# EAGLE board OctoWatchSchemePackage1NoWire (EAGLE 9.4.2)
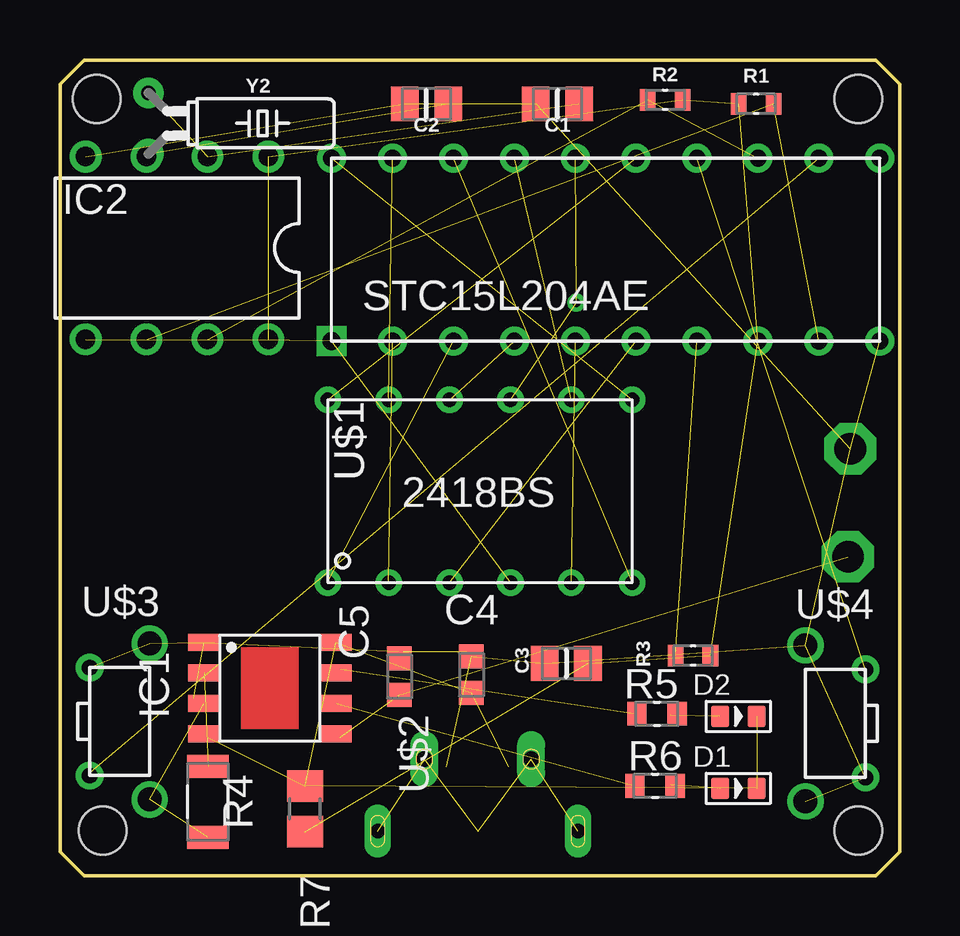
[diagram p0: board, top side]
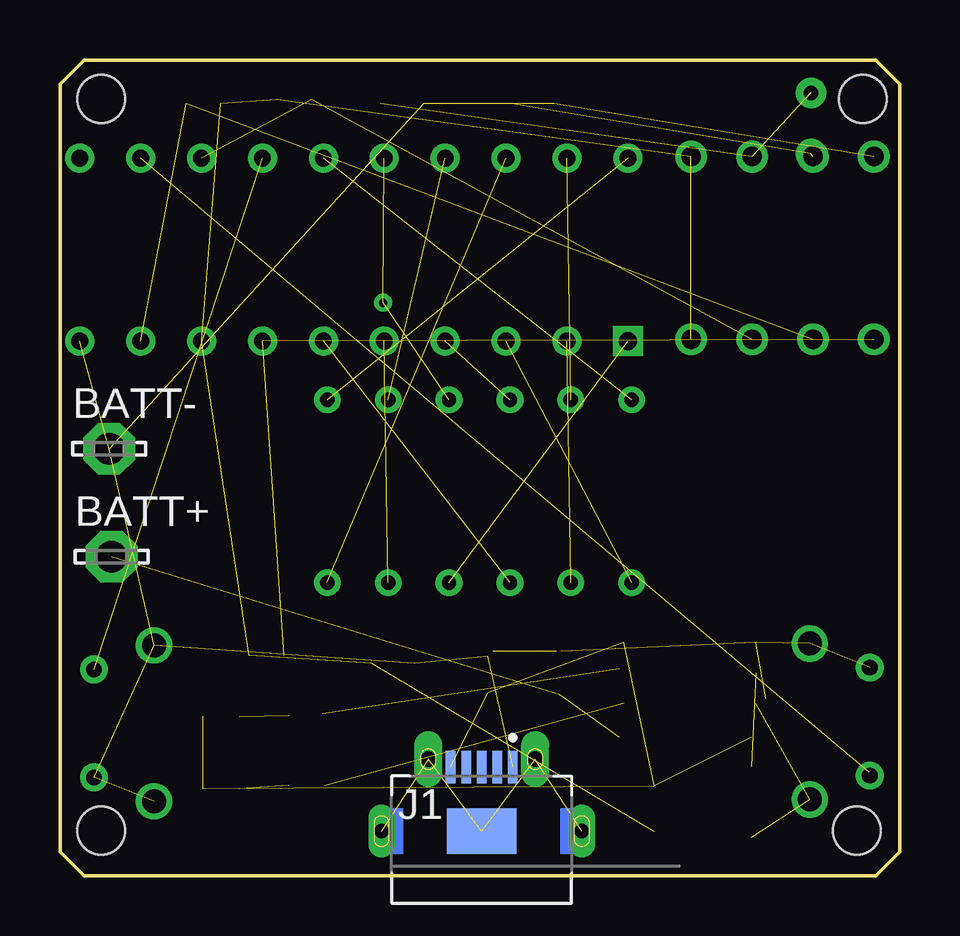
[diagram p1: board, bottom side, seen from below]

Size 35 x 34 mm. Coordinates in mm from the lower left corner, seen from the top.
Outline: 0,33 0,1 1,0 34,0 35,1 35,33 34,34 1,34 0,33
Copper layers (1*16): Top 0.035mm / dielectric 1.5mm / Bottom 0.035mm
Design rules "default *": minimum track width 10mil, minimum drill 0.35mm, track to track 6mil, track to pad 6mil, pad to pad 6mil, via to via 6mil, smd to smd 6mil, copper to edge 40mil, drill to drill 6mil, minimum pad ring 10mil, minimum via ring 8mil, stop-mask expansion 4mil, vias tented up to drill 0mil, thermal gap 10mil
Holes 2 mm at 33.28,32.38 1.53,32.38 1.78,1.88 33.28,1.88

## Footprints (pad centres in the part's own frame; a part is rotated, then mirrored left to right if it is on the bottom)
LSP13 = drill 1.321 pad 2.159 octagon: MP 0,0
CAPC2012X140N = smd 1.15 x 1.45: 1 -0.9,0; 2 0.9,0
CAPC1608X100N = smd 1 x 1.02: 1 -0.759,0; 2 0.759,0
LED-0603 = smd 0.762 x 0.889: + -0.762,0; - 0.762,0
SOP-8 = smd 1.3 x 0.7: 1 -2.75,1.905; 2 -2.75,0.635; 3 -2.75,-0.635; 4 -2.75,-1.905; 5 2.75,-1.905; 6 2.75,-0.635; 7 2.75,0.635; 8 2.75,1.905
DIL08 = drill 0.813: -RST 3.81,3.81; GND 3.81,-3.81; I/O 1.27,3.81; SCLK -1.27,3.81; VCC1 -3.81,3.81; VCC2 -3.81,-3.81; X1 -1.27,-3.81; X2 1.27,-3.81
0475900001 = smd 0.4 x 1.35: 1 1.3,2.675; 2 0.65,2.675; 3 0,2.675; 4 -0.65,2.675; 5 -1.3,2.675 | drill 0.65 pad 0.85 long: SH1 -2.225,3; SH2 2.225,3 | drill 0.6 pad 0.8 long: SH3 -4.175,0; SH4 4.175,0 | smd 2.9 x 1.9: SH5 0,0
RES_ERA3AEB103V = smd 0.65 x 0.9: 1 -0.725,0; 2 0.725,0
RESC3116X65N = smd 0.97 x 1.73: 1 -1.48,0; 2 1.48,0
RESC1608X55N = smd 0.8 x 0.98: 1 -0.837,0; 2 0.837,0
R0805 = smd 1.3 x 1.5: 1 -0.95,0; 2 0.95,0
LED_SEGMENT = drill 0.6: P$1 -12.7,7.62; P$2 -12.7,5.08; P$3 -12.7,2.54; P$4 -12.7,0; P$5 -12.7,-2.54; P$6 -12.7,-5.08; P$7 -5.08,-5.08; P$8 -5.08,-2.54; P$9 -5.08,0; P$10 -5.08,2.54; P$11 -5.08,5.08; P$12 -5.08,7.62
STC15F204AE2 = drill 0.75 square: P$1 -12.7,10.16 | drill 0.7: P$2 -12.7,7.62; P$3 -12.7,5.08; P$4 -12.7,2.54; P$5 -12.7,0; P$6 -12.7,-2.54; P$7 -12.7,-5.08; P$8 -12.7,-7.62; P$9 -12.7,-10.16; P$10 -12.7,-12.7; P$11 -5.08,-12.7; P$12 -5.08,-10.16; P$13 -5.08,-7.62; P$14 -5.08,-5.08; P$15 -5.08,-2.54; P$16 -5.08,0; P$17 -5.08,2.54; P$18 -5.08,5.08; P$19 -5.08,7.62; P$20 -5.08,10.16
BUTTON = drill 0.65: P$1 -9,4.5; P$2 -9,0 | drill 1: P$3 -11.5,-1; P$4 -11.5,5.5
CRYSTAL-PTH-2X6-CYL = drill 0.6 pad 1.27: 1 -1.27,0; 2 1.27,0

## Placement (x,y rotation side)
BATT+  LSP13  [LSP13]  32.85,13.29 0 bottom
BATT-  LSP13  [LSP13]  32.95,17.79 0 bottom
C1  CL21C220JBANNNC  [CAPC2012X140N]  20.74,32.17 180 top
C2  CL21C220JBANNNC  [CAPC2012X140N]  15.28,32.17 180 top
C3  CL21B104KCFNNNE  [CAPC2012X140N]  21.11,8.84 0 top
C4  10uf  [CAPC1608X100N]  17.15,8.37 90 top
C5  10uf  [CAPC1608X100N]  14.15,8.29 90 top
D1  SMD-LED-CLEAR-BLUE(0603)  [LED-0603]  28.28,3.63 0 top
D2  LED-SMD-RED-DIFFUSED(0603)  [LED-0603]  28.28,6.63 0 top
IC1  TP4056  [SOP-8]  8.75,7.81 0 top
IC2  DS1302  [DIL08]  4.88,26.16 180 top
J1  0475900001  [0475900001]  17.42,1.85 0 bottom
R1  ERA3AEB103V  [RES_ERA3AEB103V]  29.02,32.17 180 top
R2  ERA3AEB103V  [RES_ERA3AEB103V]  25.23,32.34 0 top
R3  ERA3AEB103V  [RES_ERA3AEB103V]  26.39,9.17 180 top
R4  122  [RESC3116X65N]  6.17,3.07 90 top
R5  102  [RESC1608X55N]  24.89,6.74 0 top
R6  102  [RESC1608X55N]  24.81,3.74 0 top
R7  104  [R0805]  10.21,2.78 270 top
U$1  [LED_SEGMENT]  18.78,24.91 90 top
U$2  [STC15F204AE2]  21.48,34.98 90 top
U$3  BUTTON  [BUTTON]  -7.76,8.67 180 top
U$4  BUTTON  [BUTTON]  42.58,4.09 0 top
Y2  32.768kHz  [CRYSTAL-PTH-2X6-CYL]  3.69,31.36 270 top

## Library data of the parts
BATT+ BATT- = solpad
C1 C2 = CL21C220JBANNNC; AVAILABILITY: In Stock; DESCRIPTION: 22pF ±5% 50V Ceramic Capacitor C0G, NP0 0805 (2012 Metric); MF: Samsung Electro-Mechanics; MP: CL21C220JBANNNC; PACKAGE: 2012-2 Samsung; PRICE: None
C3 = CL21B104KCFNNNE; AVAILABILITY: In Stock; DESCRIPTION: 0.1µF ±10% 100V Ceramic Capacitor X7R 0805 (2012 Metric); MF: Samsung; MP: CL21B104KCFNNNE; PACKAGE: 0805 Samsung; PRICE: None
C4 C5 = GRT188R61E106ME13D; AVAILABILITY: In Stock; DESCRIPTION: SMD Capacitor X5R(EIA) with Capacitance: 10uF Tol. 20%. Rated Voltage: 25Vdc; MF: Murata; MP: GRT188R61E106ME13D; PACKAGE: 1608 Murata; PRICE: None
D1 = SMD-LED-CLEAR-BLUE_0603_; AVAILABILITY: Not in stock; DESCRIPTION: Blue LED Indication - Discrete 2.8V 0603 (1608 Metric); MF: Everlight; MP: 19-217/BHC-ZL1M2RY/3T; PACKAGE: 0603 Everlight; PRICE: None
D2 = LED-SMD-RED-DIFFUSED_0603_; AVAILABILITY: In Stock; DESCRIPTION: Red LED Indication - Discrete 1.95V 0603 (1608 Metric); MF: Everlight Electronics; MP: 19-217/R6C-AL1M2VY/3T; PACKAGE: 0603 Everlight Electronics; PRICE: None
IC1 = TP4056
IC2 = ds1302
J1 = USB connector; CREATED_BY: PCBLayout.com; DIGIKEY_PARTNO: WM17144TR-ND; MANUFACTURER: Molex; MPN: 0475900001
R1-R3 = ERA3AEB103V; AVAILABILITY: No availability data; DESCRIPTION: 10 kOhms ±0.1% 0.1W, 1/10W Chip Resistor 0603 (1608 Metric) Automotive AEC-Q200 Thin Film; MF: Panasonic; MP: ERA3AEB103V; PACKAGE: 1608-2 Panasonic; PRICE: None
R4 = AC1206FR-073K9L; AVAILABILITY: In Stock; DESCRIPTION: Res Thick Film 1206 3.9K Ohm 1% 0.25W(1/4W) ±100ppm/°C Pad SMD Automotive T/R; MF: Yageo; MP: AC1206FR-073K9L; PACKAGE: 3116 Yageo; PRICE: None
R5 R6 = ERJ-PB3B1001V; AVAILABILITY: In Stock; DESCRIPTION: 1 kOhms ±0.1% 0.2W, 1/5W Chip Resistor 0603 (1608 Metric) Automotive AEC-Q200, Pulse Withstanding Thick Film; MF: Panasonic Electronic; MP: ERJ-PB3B1001V; PACKAGE: 1608 Panasonic Electronic Components; PRICE: None
R7 = rcl; SPICEPREFIX: R
U$1-U$4 = OctoWatch
Y2 = SparkFun-Clocks; PROD_ID: XTAL-10112

## Nets
BATT+: C3.2 IC2.VCC1 IC2.VCC2 R1.2 R2.2 R3.1 R7.2 U$2.P$8
GND: BATT-.MP C1.2 C2.2 C3.1 C4.2 C5.2 IC1.1 IC1.3 IC2.GND J1.1 R4.1 U$2.P$10 U$3.P$2 U$3.P$3 U$3.P$4 U$4.P$2 U$4.P$3 U$4.P$4
N$1: U$1.P$1 U$2.P$3
N$2: U$1.P$2 U$2.P$2
N$3: U$1.P$4 U$2.P$1
N$4: U$1.P$3 U$2.P$6
N$5: U$1.P$5 U$2.P$5
N$6: U$1.P$6 U$2.P$18
N$7: U$1.P$7 U$2.P$20
N$8: U$1.P$8 U$2.P$17
N$9: U$1.P$9 U$2.P$16
N$10: IC2.SCLK R2.1 U$2.P$13
N$11: IC2.-RST R3.2 U$2.P$7
N$12: U$1.P$12 U$2.P$15
N$13: C1.1 IC2.X1 Y2.1
N$14: C4.1 D1.- D2.- IC1.4 IC1.8 J1.5 R7.1
N$15: C2.1 IC2.X2 Y2.2
N$16: U$1.P$10 U$2.P$4
N$17: IC2.I/O R1.1 U$2.P$9
N$18: BATT+.MP C5.1 IC1.5
N$19: U$2.P$14 U$4.P$1
N$20: U$2.P$12 U$3.P$1
N$21: U$1.P$11 U$2.P$19
N$26: IC1.6 R6.1
N$27: D1.+ R6.2
N$28: IC1.7 R5.1
N$29: D2.+ R5.2
N$31: IC1.2 R4.2
SHIELD: J1.SH1 J1.SH2 J1.SH3 J1.SH4 J1.SH5

## Tracks (layer width: path | path; a pad name or v marks a point on that pad's centre or on a via)
BATT+  (7 unrouted)
GND  (17 unrouted)
  Top 0.254: 14.11,9.35 C5.2 14.31,9.35 | 16.95,9.35 C4.2 | 5.57,7.39 IC1.3
N$1  (1 unrouted)
N$2  (1 unrouted)
N$3  (1 unrouted)
N$4  (1 unrouted)
N$5  (1 unrouted)
N$6  (1 unrouted)
N$7  (1 unrouted)
N$8  (1 unrouted)
N$9  (via drill 0.35)  (2 unrouted)
  other vias: 21.53,23.88
N$10  (2 unrouted)
N$11  (2 unrouted)
N$12  (1 unrouted)
N$13  (2 unrouted)
N$14  (6 unrouted)
  Top 0.254: 6.18,5.77 IC1.4
N$15  (2 unrouted)
N$16  (1 unrouted)
N$17  (2 unrouted)
N$18  (2 unrouted)
  Top 0.254: 11.67,5.77 IC1.5
N$19  (1 unrouted)
N$20  (1 unrouted)
  Bottom 0.254: 1.26,4.31 U$3.P$1
N$21  (1 unrouted)
N$26  (1 unrouted)
  Top 0.254: 24.22,3.78 R6.1
N$27  (1 unrouted)
  Top 0.254: 25.44,3.78 R6.2
N$28  (1 unrouted)
  Top 0.254: 11.67,8.41 IC1.7 11.67,8.61 | 24.22,6.67 R5.1
N$29  (1 unrouted)
  Top 0.254: 25.44,6.67 R5.2
N$31  (1 unrouted)
  Top 0.254: 6.18,8.41 IC1.2
SHIELD  (4 unrouted)